# EAGLE board exp-4_pcb (EAGLE 9.6.2)
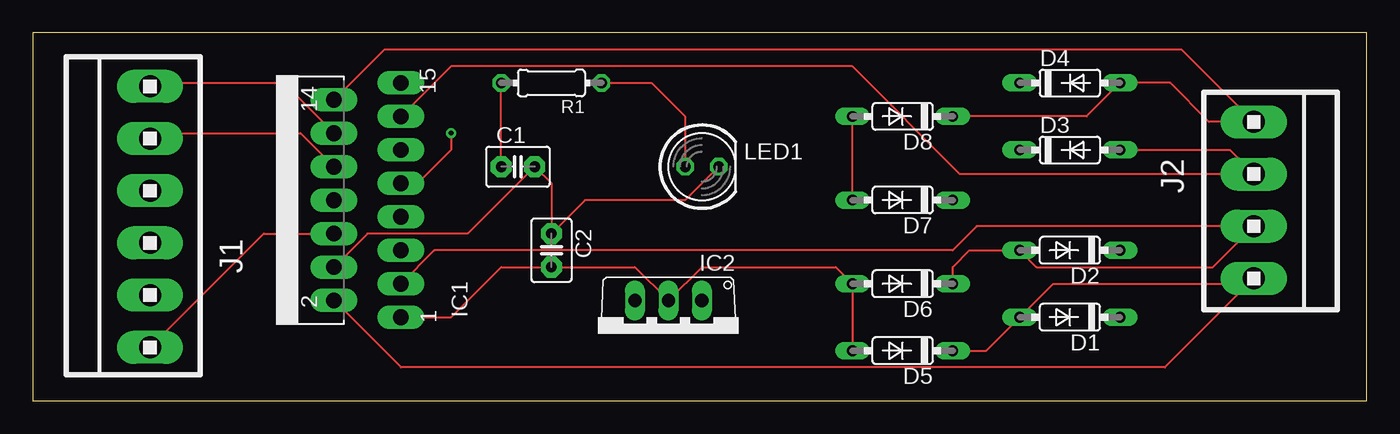
[diagram p0: board, top side]
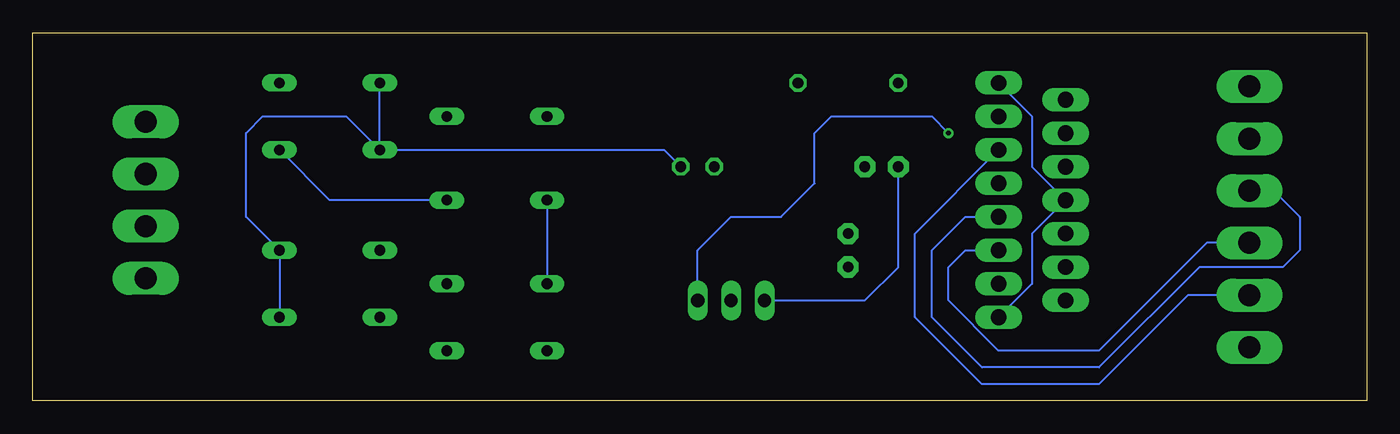
[diagram p1: board, bottom side, seen from below]

Size 101.27 x 27.93 mm. Coordinates in mm from the lower left corner, seen from the top.
Outline: 0,0 101.27,0 101.27,27.93 0,27.93 0,0
Copper layers (1*16): Top 0.035mm / dielectric 1.5mm / Bottom 0.035mm
Design rules "default": minimum track width 6mil, minimum drill 0.35mm, track to track 6mil, track to pad 6mil, pad to pad 6mil, via to via 6mil, smd to smd 6mil, copper to edge 40mil, drill to drill 6mil, minimum pad ring 10mil, minimum via ring 8mil, stop-mask expansion 4mil, vias tented up to drill 0mil, thermal gap 10mil

## Footprints (pad centres in the part's own frame; a part is rotated, then mirrored left to right if it is on the bottom)
C2.5-3 = drill 0.813 pad 1.6 octagon: 1 -1.27,0; 2 1.27,0
DO35-7 = drill 0.813 long: A 3.81,0; C -3.81,0
MULTIWATT-15 = drill 1.2 long: 1 -8.89,-7.62; 2 -7.62,-2.54; 3 -6.35,-7.62; 4 -5.08,-2.54; 5 -3.81,-7.62; 6 -2.54,-2.54; 7 -1.27,-7.62; 8 0,-2.54; 9 1.27,-7.62; 10 2.54,-2.54; 11 3.81,-7.62; 12 5.08,-2.54; 13 6.35,-7.62; 14 7.62,-2.54; 15 8.89,-7.62
TO220V = drill 1.016 long: 1 -2.54,-2.54; 2 0,-2.54; 3 2.54,-2.54
1X6MTA = drill 1.676 long: 1 9.906,0; 2 5.944,0; 3 1.981,0; 4 -1.981,0; 5 -5.944,0; 6 -9.906,0
1X4MTA = drill 1.676 long: 1 5.944,0; 2 1.981,0; 3 -1.981,0; 4 -5.944,0
LED5MM = drill 0.813 octagon: A -1.27,0; K 1.27,0
0204/7 = drill 0.813 octagon: 1 -3.81,0; 2 3.81,0

## Placement (x,y rotation side)
C1  220uF  [C2.5-3]  36.83,17.78 0 top
C2  220uF  [C2.5-3]  39.37,11.43 270 top
D1  1N4148DO35-7  [DO35-7]  78.74,6.35 180 top
D2  1N4148DO35-7  [DO35-7]  78.74,11.43 180 top
D3  1N4148DO35-7  [DO35-7]  78.74,19.05 0 top
D4  1N4148DO35-7  [DO35-7]  78.74,24.13 0 top
D5  1N4148DO35-7  [DO35-7]  66.04,3.81 180 top
D6  1N4148DO35-7  [DO35-7]  66.04,8.89 180 top
D7  1N4148DO35-7  [DO35-7]  66.04,15.24 180 top
D8  1N4148DO35-7  [DO35-7]  66.04,21.59 180 top
IC1  L298  [MULTIWATT-15]  20.32,15.24 90 top
IC2  7805TV  [TO220V]  48.26,5.08 180 top
J1  1  [1X6MTA]  8.89,13.97 90 top
J2  1  [1X4MTA]  92.71,15.24 270 top
LED1  1  [LED5MM]  50.8,17.78 0 top
R1  1K  [0204/7]  39.37,24.13 180 top

## Library data of the parts
C1 C2 = capacitor-wima
D1-D8 = diode
IC1 = st-microelectronics; MPN: L298N; OC_FARNELL: 1589425; OC_NEWARK: 32M1527
IC2 = linear
J1 J2 = con-amp
LED1 = led
R1 = rcl; SPICEPREFIX: R

## Nets
GND: C2.2 D5.A D6.A D7.A D8.A IC1.1 IC1.8 IC1.15 IC2.2
N$1: IC1.9 IC2.1
N$2: C1.1 IC2.3 R1.2
N$3: C1.2 C2.1 D1.C D2.C D3.C D4.C IC1.4 LED1.K
N$4: LED1.A R1.1
N$5: D1.A D5.C IC1.2 J2.1
N$6: IC1.6 J1.6
N$7: IC1.11 J1.5
N$8: IC1.5 J1.4
N$9: IC1.7 J1.3
N$10: IC1.10 J1.2
N$11: IC1.12 J1.1
N$12: D2.A D6.C IC1.3 J2.2
N$13: D3.A D7.C IC1.13 J2.3
N$14: D4.A D8.C IC1.14 J2.4

## Tracks (layer width: path | path; a pad name or v marks a point on that pad's centre or on a via)
GND
  Top 0.152: IC1.1 31.75,6.35 35.56,10.16 C2.2 45.72,10.16 IC2.2 50.8,10.16 60.96,10.16 D6.A D5.A | D7.A D8.A
  Bottom 0.152: IC1.15 25.4,21.59 25.4,17.78 IC1.8 25.4,12.7 25.4,8.89 IC1.1 | D7.A D6.A
N$1  (via drill 0.35)
  Top 0.152: v31.75,20.32 31.75,19.05 29.21,16.51 IC1.9
  Bottom 0.152: IC2.1 50.8,11.43 48.26,13.97 44.45,13.97 41.91,16.51 41.91,20.32 40.64,21.59 33.02,21.59 v31.75,20.32
N$2
  Top 0.152: C1.1 R1.2
  Bottom 0.152: IC2.3 38.1,7.62 35.56,10.16 C1.1
N$3
  Top 0.152: IC1.4 25.4,12.7 33.02,12.7 C1.2 39.37,16.51 C2.1 41.91,15.24 49.53,15.24 LED1.K
  Bottom 0.152: D3.C 77.47,21.59 83.82,21.59 85.09,20.32 85.09,13.97 D2.C D1.C | D3.C D4.C | D3.C 53.34,19.05 LED1.K
N$4
  Top 0.152: LED1.A 49.53,21.59 46.99,24.13 R1.1
N$5
  Top 0.152: J2.1 92.51,9.09 92.3,8.89 | 92.3,8.89 85.95,2.54 27.94,2.54 IC1.2 | D5.C 72.39,3.81 D1.A 77.47,8.89 92.3,8.89
N$6
  Top 0.152: J1.6 17.53,12.7 IC1.6
N$7
  Bottom 0.152: J1.5 13.56,8.03 20.32,1.27 29.21,1.27 34.29,6.35 34.29,12.7 IC1.11
N$8
  Bottom 0.152: J1.4 12.14,11.99 20.32,3.81 27.94,3.81 31.75,7.62 31.75,10.16 30.48,11.43 IC1.5
N$9
  Bottom 0.152: J1.3 7.06,15.95 5.08,13.97 5.08,11.43 6.35,10.16 12.7,10.16 20.32,2.54 29.21,2.54 33.02,6.35 33.02,11.43 30.48,13.97 IC1.7
N$10
  Top 0.152: J1.2 9.3,20.32 20.32,20.32 IC1.10
N$11
  Top 0.152: J1.1 9.14,24.13 19.05,24.13 IC1.12
N$12
  Top 0.152: IC1.3 30.48,11.43 69.85,11.43 71.68,13.26 J2.2 89.61,10.16 76.2,10.16 D2.A 71.12,11.43 69.85,10.16 D6.C
N$13
  Top 0.152: IC1.13 31.75,25.4 62.23,25.4 70.41,17.22 J2.3 90.88,19.05 D3.A
  Bottom 0.152: D7.C 78.74,15.24 D3.A
N$14
  Top 0.152: IC1.14 26.67,26.67 87.22,26.67 J2.4 89.31,21.18 86.36,24.13 D4.A 80.01,21.59 D8.C